# Altium PCB Växelriktare.PcbDoc (part 1 of 2)
Units mm, origin at the board's own origin, x right, y up, seen from the top; angles counter-clockwise.
Board outline 240.5 x 224.5 mm, 2 copper layers (Top Layer, Bottom Layer); 202 components, 114 nets, 617 pads, 31 vias.
Unrouted connection lines stored in the file: 137.
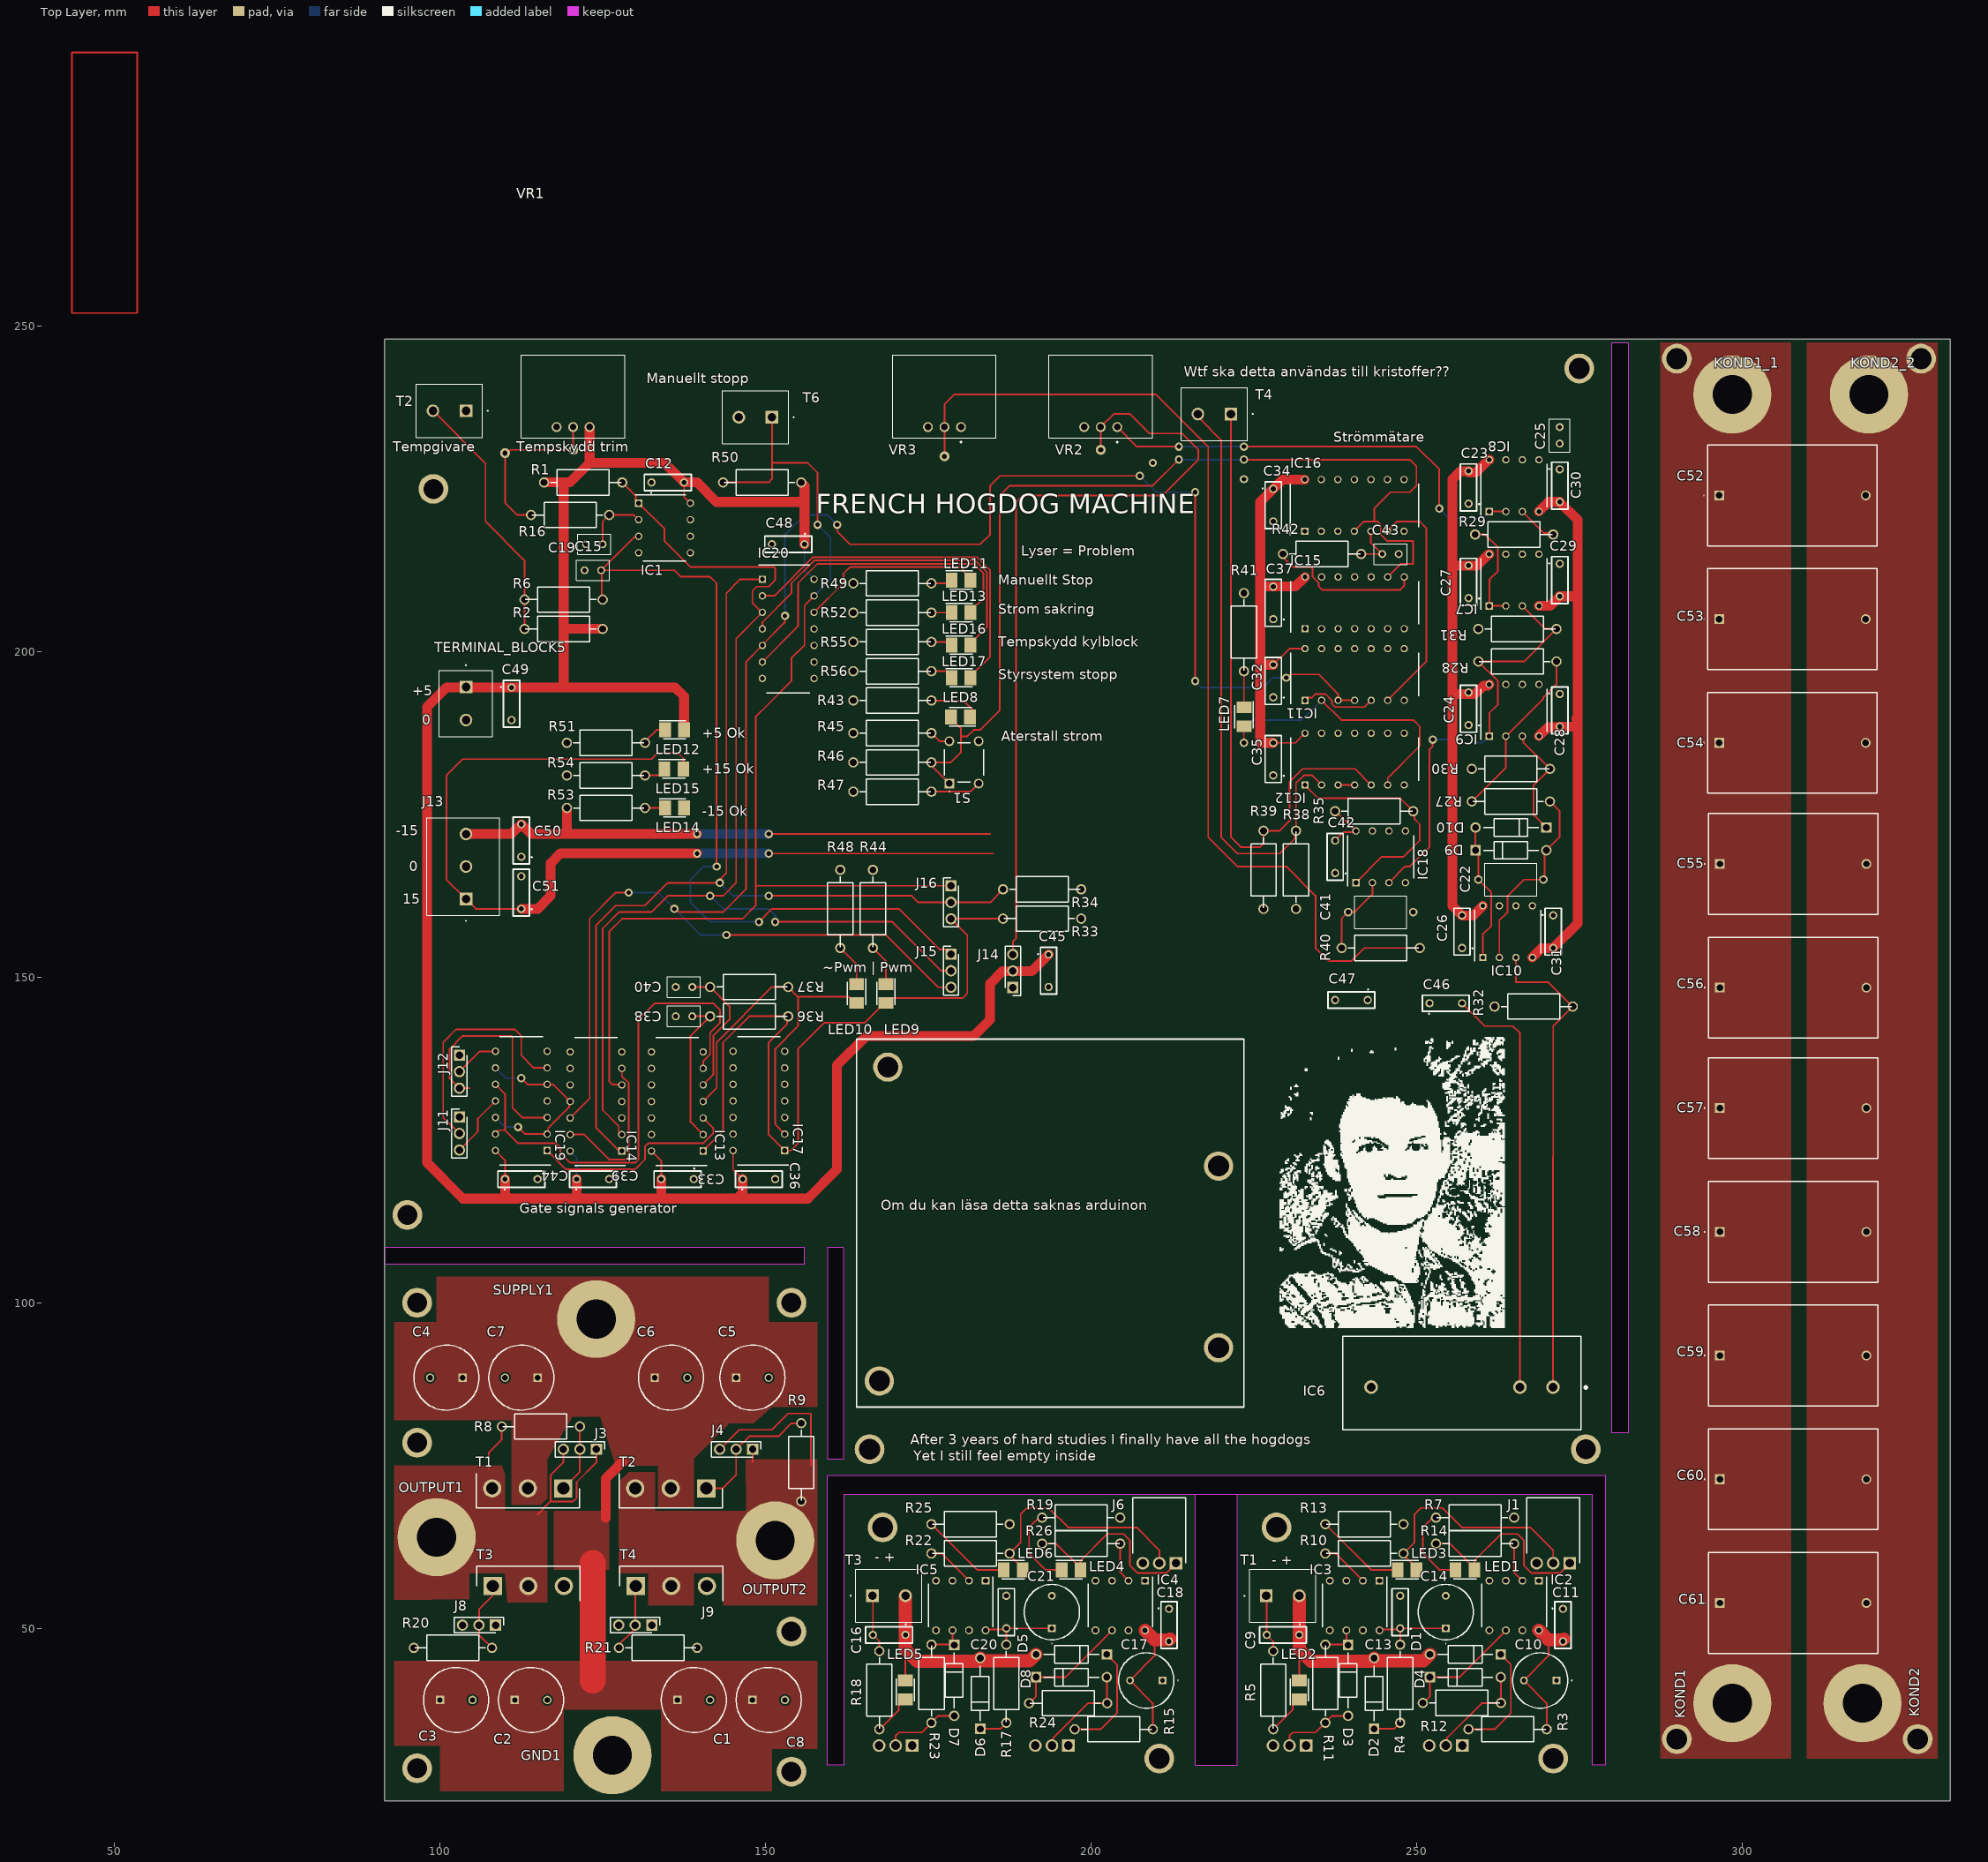
[diagram p0: Top Layer view]
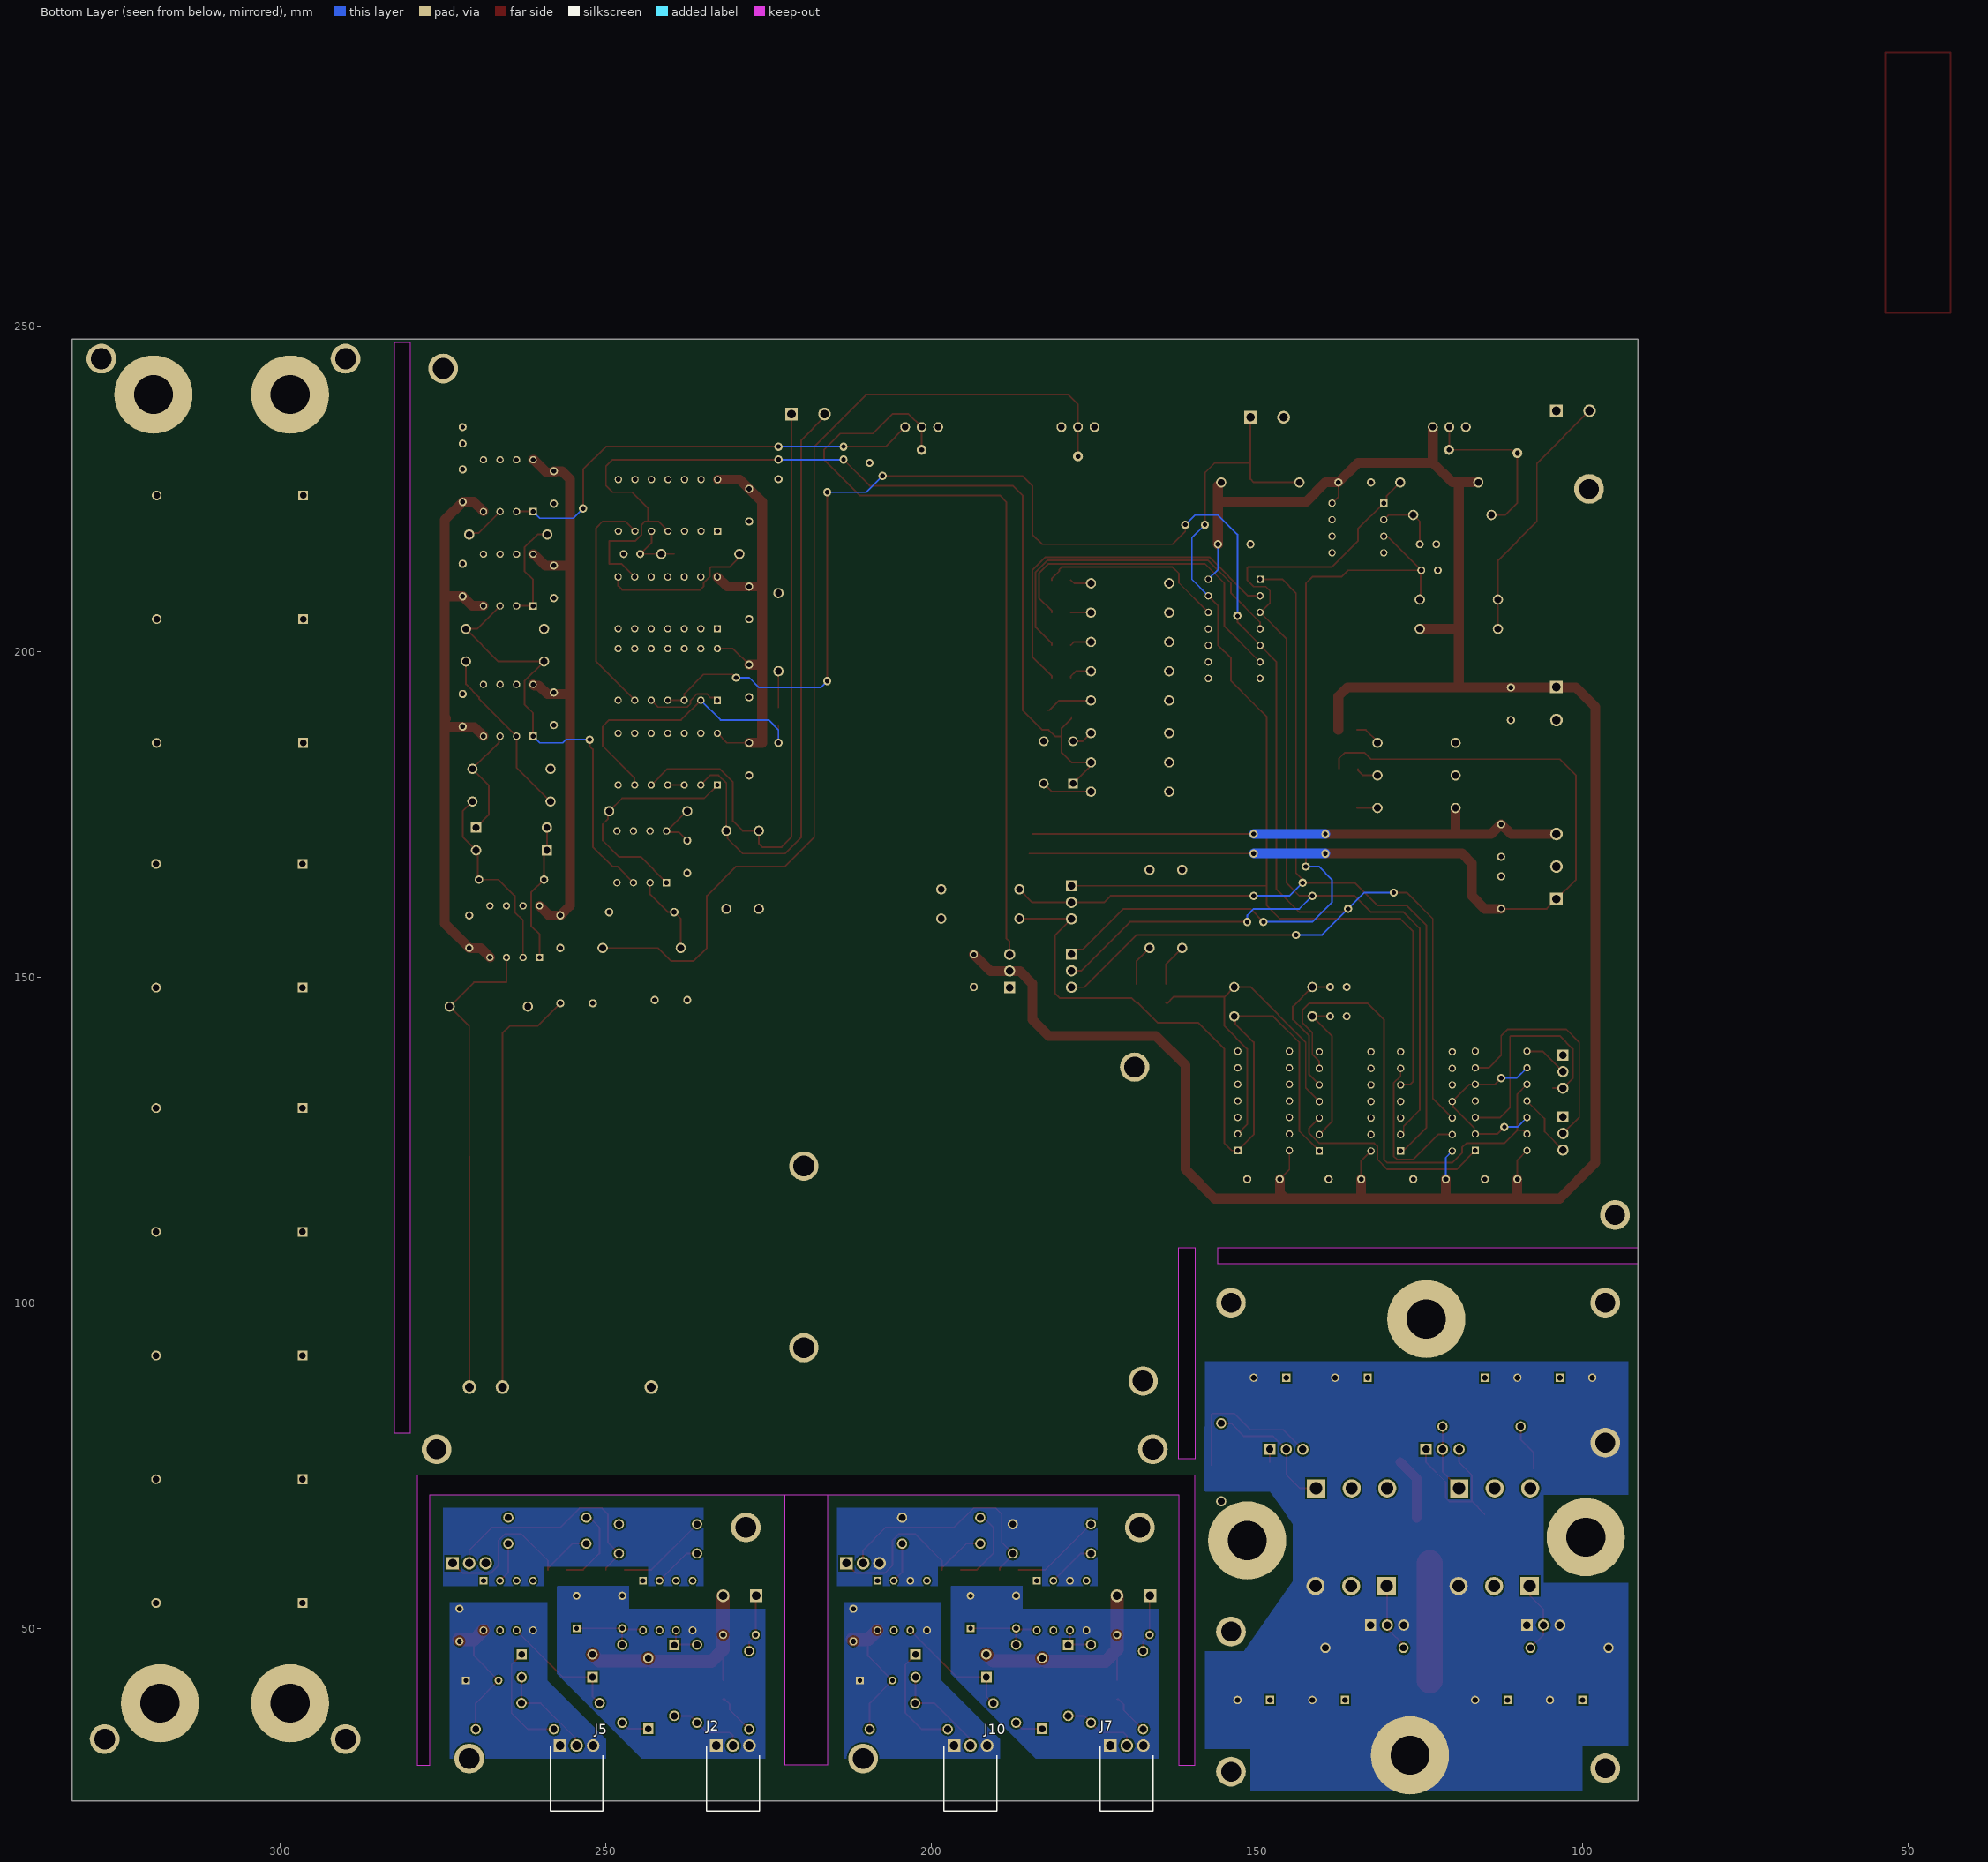
[diagram p1: Bottom Layer view, seen from below]

## Layer stack, top to bottom
Top Solder: solder mask 0.0102, Solder Resist, Dk 3.5
Top Layer: signal copper 0.0356
Dielectric 1: dielectric 0.32, FR-4, Dk 4.8
Bottom Layer: signal copper 0.0356
Bottom Solder: solder mask 0.0102, Solder Resist, Dk 3.5

## Board outline
91.5,23.5 332,23.5 332,248 91.5,248
cut-out: 159.5,76 162,76 162,108.5 159.5,108.5
cut-out: 280,247.5 282.5,247.5 282.5,80 280,80
cut-out: 91.5,106 156,106 156,108.5 91.5,108.5
cut-out: 216,70.5 216,29 222.5,29 222.5,70.5
cut-out: 159.5,73.5 279,73.5 279,29 277,29 277,70.5 162,70.5 162,29 159.5,29

## Design rules (kind name [scope] priority, off if disabled: settings)
Clearance [All] p1: gap=0.254 ignorepadtopadclearanceinfootprint=FALSE except(0: Arc-Hole Track-Hole SMDPad-Hole THPad-Hole Via-Hole Fill-Hole Poly-Hole Region-Hole Text-Hole)
PlaneConnect [InNet('GND_Galv')] p1: planeconnectstyle=Relief reliefexpansion=0.508 reliefentries=4 reliefconductorwidth=0.254 reliefairgap=0.254
PolygonConnect connect [All vs IsNamedPolygon('NONET_L-01_P-001')] p1: connectstyle=Direct reliefconductorwidth=0.254 reliefentries=4 polygonreliefangle="90 Angle" airgapwidth=0.254
PolygonConnect [All] p2: connectstyle=Relief reliefconductorwidth=0.254 reliefentries=4 polygonreliefangle="90 Angle" airgapwidth=0.254
RoutingVias [All] p1: holewidth=0.711 width=1.27 viastyle="Through Hole" minholewidth=0.711 minwidth=1.27 maxholewidth=0.711 maxwidth=1.27
SolderMaskExpansion [All] p1: expansion=0.102 istentingtop=FALSE
Width [All] p1: maxlimit=20 minlimit=0.254 preferedwidth=0.254 minimp=50.000000 maximp=50.000000 favimp=50.000000
29 further rules are at their usual default settings.

## Components (designator, comment, footprint, x,y, rotation, side; value= is the part's Value field where it differs from the comment)
C1 "63SXE100M" CAPPRD500W65D1000H1300 136.5,39 r0 top
C2 "63SXE100M" CAPPRD500W65D1000H1300 111.5,39 r0 top
C3 "63SXE100M" CAPPRD500W65D1000H1300 100,39 r0 top
C4 "63SXE100M" CAPPRD500W65D1000H1300 103.5,88.5 r180 top
C5 "63SXE100M" CAPPRD500W65D1000H1300 145.5,88.5 r0 top
C6 "63SXE100M" CAPPRD500W65D1000H1300 133,88.5 r0 top
C7 "63SXE100M" CAPPRD500W65D1000H1300 115,88.5 r180 top
C8 "63SXE100M" CAPPRD500W65D1000H1300 148,39 r0 top
C9 "0.1 uF" R82(7.2X2.5) 229.5,49 r180 top
C10 "10uF" 1814768 271.5,42 r180 top
C11 "0.1 uF" R82(7.2X2.5) 272.5,50.5 r270 top
C12 "0.1 uF" R82(7.2X2.5) 135,226 r0 top
C13 "0.1 uF" R82(7.2X2.5) 247.5,52.5 r90 top
C14 "10uF" 1814768 254.5,50 r90 top
C15 "" C320C334K5R5TA91707301 123.5,212.5 r0 top
C16 "0.1 uF" R82(7.2X2.5) 169,49 r180 top
C17 "10uF" 1814768 211,42 r180 top
C18 "0.1 uF" R82(7.2X2.5) 212,50.5 r270 top
C19 "0.1 uF" C320C334K5R5TA91707301 123.73,216.5 r0 top
C20 "0.1 uF" R82(7.2X2.5) 187,52.5 r90 top
C21 "10uF" 1814768 194,50 r90 top
C22 "47 pF" DE11XRA470KA4BQ01F 269.5,165 r180 top
C23 "0.1 uF" R82(7.2X2.5) 258,225.23 r90 top
C24 "0.1 uF" R82(7.2X2.5) 258,191.23 r90 top
C25 "C320C334K5R5TA91707301" C320C334K5R5TA91707301 272,233.23 r90 top
C26 "0.1 uF" R82(7.2X2.5) 257,157 r90 top
C27 "0.1 uF" R82(7.2X2.5) 258,210.73 r90 top
C28 "0.1 uF" R82(7.2X2.5) 272,191 r270 top
C29 "0.1 uF" R82(7.2X2.5) 272,211 r270 top
C30 "0.1 uF" R82(7.2X2.5) 272,225.5 r270 top
C31 "0.1 uF" R82(7.2X2.5) 271,157 r270 top
C32 "0.1 uF" R82(7.2X2.5) 228,195.5 r90 top
C33 "0.1 uF" R82(7.2X2.5) 136.5,119 r180 top
C34 "0.1 uF" R82(7.2X2.5) 228,222.5 r270 top
C35 "0.1 uF" R82(7.2X2.5) 228,183.5 r90 top
C36 "0.1 uF" R82(7.2X2.5) 149,119 r0 top
C37 "0.1 uF" R82(7.2X2.5) 228,207.5 r90 top
C38 "C320C334K5R5TA91707301" C320C334K5R5TA91707301 137.5,144 r180 top
C39 "0.1 uF" R82(7.2X2.5) 123.5,119 r0 top
C40 "C320C334K5R5TA91707301" C320C334K5R5TA91707301 137.5,148.5 r180 top
C41 "47 pF" DE11XRA470KA4BQ01F 249.5,160 r180 top
C42 "0.1 uF" R82(7.2X2.5) 237.5,168.5 r90 top
C43 "0.1 uF" C320C334K5R5TA91707301 246,215 r0 top
C44 "0.1 uF" R82(7.2X2.5) 112.5,119 r0 top
C45 "0.1 uF" R82(7.2X2.5) 193.5,151 r270 top
C46 "0.1 uF" R82(7.2X2.5) 254.5,146 r0 top
C47 "0.1 uF" R82(7.2X2.5) 240,146.5 r180 top
C48 "0.1 uF" R82(7.2X2.5) 153.5,216.5 r180 top
C49 "0.1 uF" R82(7.2X2.5) 111,192 r270 top
C50 "0.1 uF" R82(7.2X2.5) 112.5,171 r90 top
C51 "0.1 uF" R82(7.2X2.5) 112.5,163 r90 top
C52 "0.22u" PHE845VY6220MR30L2 296.5,224 r0 top
C53 "0.22u" PHE845VY6220MR30L2 296.5,205 r0 top
C54 "0.22u" PHE845VY6220MR30L2 296.5,186 r0 top
C55 "0.22u" PHE845VY6220MR30L2 296.6,167.401 r0 top
C56 "0.22u" PHE845VY6220MR30L2 296.6,148.401 r0 top
C57 "0.22u" PHE845VY6220MR30L2 296.6,129.901 r0 top
C58 "0.22u" PHE845VY6220MR30L2 296.6,110.901 r0 top
C59 "0.22u" PHE845VY6220MR30L2 296.6,91.901 r0 top
C60 "0.22u" PHE845VY6220MR30L2 296.6,72.901 r0 top
C61 "0.22u" PHE845VY6220MR30L2 296.6,53.901 r0 top
D1 "UF4007-E3/54" FP-UF4007-MFG 257.5,46 r180 top value=17pF
D2 "UF4007-E3/54" FP-UF4007-MFG 243.5,40 r90 top value=17pF
D3 "UF4007-E3/54" FP-UF4007-MFG 239.5,42 r270 top value=17pF
D4 "UF4007-E3/54" FP-UF4007-MFG 257.5,42.5 r0 top value=17pF
D5 "UF4007-E3/54" FP-UF4007-MFG 197,46 r180 top value=17pF
D6 "UF4007-E3/54" FP-UF4007-MFG 183,40 r90 top value=17pF
D7 "UF4007-E3/54" FP-UF4007-MFG 179,42 r270 top value=17pF
D8 "UF4007-E3/54" FP-UF4007-MFG 197,42.5 r0 top value=17pF
D9 "UF4007-E3/54" FP-UF4007-MFG 264.5,169.5 r0 top value=17pF
D10 "UF4007-E3/54" FP-UF4007-MFG 264.5,173 r180 top value=17pF
GND1 "PADS_01" PCBComponent_1 126.5,30.5 r0 top
IC1 "LM393P" DIP794W53P254L959H508Q8N 134.5,219 r0 top
IC2 "TLP350_F_" DIP762W60P254L966H485Q8N 265,53.5 r270 top
IC3 "TLP350_F_" DIP762W60P254L966H485Q8N 240.5,53.5 r270 top
IC4 "TLP350_F_" DIP762W60P254L966H485Q8N 204.5,53.5 r270 top
IC5 "TLP350_F_" DIP762W60P254L966H485Q8N 180,53.5 r270 top
IC6 "LA_100-P" LA-100-P 257,80.5 r180 top
IC7 "TL082IP" DIP794W53P254L959H508Q8N 265,211 r90 top
IC8 "TL082IP" DIP794W53P254L959H508Q8N 265,225.5 r90 top
IC9 "TL082IP" DIP794W53P254L959H508Q8N 265,191 r90 top
IC10 "TL082IP" DIP794W53P254L959H508Q8N 264,157 r90 top
IC11 "SN74HC02N" DIP794W53P254L1930H508Q14N 240.5,196.5 r90 top
IC12 "SN74HC32N" DIP794W53P254L1930H508Q14N 240.5,183.5 r90 top
IC13 "SN74HC08N" DIP794W53P254L1930H508Q14N 136.47,130.92 r180 top
IC14 "SN74HC08N" DIP794W53P254L1930H508Q14N 123.97,130.92 r180 top
IC15 "SN74HCT04N" DIP794W53P254L1930H508Q14N 240.5,207.5 r90 top
IC16 "SN74HC08N" DIP794W53P254L1930H508Q14N 240.46,222.47 r90 top
IC17 "SN74HCT04N" DIP794W53P254L1930H508Q14N 149,131 r180 top
IC18 "LM393P" DIP794W53P254L959H508Q8N 244.5,168.5 r90 top
IC19 "SN74HC08N" DIP794W53P254L1930H508Q14N 112.5,131 r180 top
IC20 "SN74HCT04N" DIP794W53P254L1930H508Q14N 153.5,203.5 r0 top
J1 "angled" RHDRRA3W79P254_1X3_813X851X241P 273.54,60 r0 top
J2 "angled" RHDRRA3W79P254_1X3_813X851X241P 233.04,32 r0 bottom
J3 "straight" HDRV3W67P0X254_1X3_737X236X1117P 124.04,77.5 r180 top
J4 "straight" HDRV3W67P0X254_1X3_737X236X1117P 148.04,77.5 r180 top
J5 "angled" RHDRRA3W79P254_1X3_813X851X241P 257.04,32 r0 bottom
J6 "angled" RHDRRA3W79P254_1X3_813X851X241P 213.04,60 r0 top
J7 "angled" RHDRRA3W79P254_1X3_813X851X241P 172.54,32 r0 bottom
J8 "straight" HDRV3W67P0X254_1X3_737X236X1117P 108.54,50.5 r180 top
J9 "straight" HDRV3W67P0X254_1X3_737X236X1117P 132.54,50.5 r180 top
J10 "angled" RHDRRA3W79P254_1X3_813X851X241P 196.54,32 r0 bottom
J11 "straight" HDRV3W67P0X254_1X3_737X236X1117P 103,128.54 r270 top
J12 "straight" HDRV3W67P0X254_1X3_737X236X1117P 103,138.04 r270 top
J13 "PLUS" 1711039 104,162 r90 top
J14 "straight" HDRV3W67P0X254_1X3_737X236X1117P 188,148.42 r90 top
J15 "straight" HDRV3W67P0X254_1X3_737X236X1117P 178.5,153.54 r270 top
J16 "straight" HDRV3W67P0X254_1X3_737X236X1117P 178.5,164.04 r270 top
KOND1 "PADS_01" PCBComponent_1 298.5,38.5 r0 top
KOND1_1 "PADS_01" PCBComponent_1 298.5,239.5 r90 top
KOND2 "PADS_01" PCBComponent_1 318.5,38.5 r0 top
KOND2_2 "PADS_01" PCBComponent_1 319.5,239.5 r90 top
LED1 "150141RS73113" LEDM3528X210N 257.45,59 r0 top
LED2 "150141RS73113" LEDM3528X210N 232,40.55 r90 top
LED3 "150141RS73113" LEDM3528X210N 248.55,59 r0 top
LED4 "150141RS73113" LEDM3528X210N 196.95,59 r0 top
LED5 "150141RS73113" LEDM3528X210N 171.5,40.55 r90 top
LED6 "150141RS73113" LEDM3528X210N 188.05,59 r0 top
LED7 "150141RS73113" LEDM3528X210N 223.5,190 r270 top
LED8 "150141RS73113" LEDM3528X210N 179.95,190 r180 top
LED9 "150141RS73113" LEDM3528X210N 168.5,147.5 r270 top
LED10 "150141RS73113" LEDM3528X210N 164,147.5 r270 top
LED11 "150141RS73113" LEDM3528X210N 180.05,211 r0 top
LED12 "150141RS73113" LEDM3528X210N 136.05,188 r0 top
LED13 "150141RS73113" LEDM3528X210N 180.05,206 r0 top
LED14 "150141RS73113" LEDM3528X210N 136.05,176 r0 top
LED15 "150141RS73113" LEDM3528X210N 135.95,182 r0 top
LED16 "150141RS73113" LEDM3528X210N 180.05,201 r0 top
LED17 "150141RS73113" LEDM3528X210N 180.05,196 r0 top
OUTPUT1 "PADS_01" PCBComponent_1 99.5,64 r0 top
OUTPUT2 "PADS_01" PCBComponent_1 151.5,63.5 r0 top
R1 "" RESAD2760W83L1200D390 128,226 r180 top
R2 "330 ohm" RESAD2760W83L1200D390 113,203.5 r0 top
R3 "10 ohm" RESAD2760W83L1200D390 270,34.5 r180 top
R4 "10 ohm" RESAD2760W83L1200D390 247.5,35.5 r90 top
R5 "2k" RESAD2760W83L1200D390 228,34.5 r90 top
R6 "" RESAD2760W83L1200D390 113,208 r0 top
R7 "1k" RESAD2760W83L1200D390 253,67 r0 top
R8 "10k ohm" RESAD2760W83L1200D390 109.5,81 r0 top
R9 "10k ohm" RESAD2760W83L1200D390 155.5,69.5 r90 top
R10 "330 ohm" RESAD2760W83L1200D390 236,61.5 r0 top
R11 "10 ohm" RESAD2760W83L1200D390 236,47.5 r270 top
R12 "10 ohm" RESAD2760W83L1200D390 262.969,38.531 r180 top
R13 "1k" RESAD2760W83L1200D390 236,66 r0 top
R14 "330 ohm" RESAD2760W83L1200D390 265,63 r180 top
R15 "10 ohm" RESAD2760W83L1200D390 209.5,34.5 r180 top
R16 "" RESAD2760W83L1200D390 114,221 r0 top
R17 "10 ohm" RESAD2760W83L1200D390 187,35.5 r90 top
R18 "2k" RESAD2760W83L1200D390 167.5,34.5 r90 top
R19 "1k" RESAD2760W83L1200D390 192.5,67 r0 top
R20 "10k ohm" RESAD2760W83L1200D390 96,47 r0 top
R21 "10k ohm" RESAD2760W83L1200D390 139.5,47 r180 top
R22 "330 ohm" RESAD2760W83L1200D390 175.5,61.5 r0 top
R23 "10 ohm" RESAD2760W83L1200D390 175.5,47.5 r270 top
R24 "10 ohm" RESAD2760W83L1200D390 190.5,38.5 r0 top
R25 "1k" RESAD2760W83L1200D390 175.5,66 r0 top
R26 "330 ohm" RESAD2760W83L1200D390 204.5,63 r180 top
R27 "PR02000201009JR500" RESAD2760W83L1200D390 258.5,177 r0 top
R28 "PR02000201009JR500" RESAD2760W83L1200D390 259.5,198.5 r0 top
R29 "PR02000201009JR500" RESAD2760W83L1200D390 271,218 r180 top
R30 "PR02000201009JR500" RESAD2760W83L1200D390 270.5,182 r180 top
R31 "PR02000201009JR500" RESAD2760W83L1200D390 271.5,203.5 r180 top
R32 "PR02000201009JR500" RESAD2760W83L1200D390 274,145.5 r180 top
R33 "1k" RESAD2760W83L1200D390 186.5,159 r0 top
R34 "1k" RESAD2760W83L1200D390 198.5,163.5 r180 top
R35 "5.1k" RESAD2760W83L1200D390 249.5,175.5 r180 top
R36 "PR02000201009JR500" RESAD2760W83L1200D390 153.5,144 r180 top
R37 "PR02000201009JR500" RESAD2760W83L1200D390 153.5,148.5 r180 top
R38 "PR02000201009JR500" RESAD2760W83L1200D390 231.5,172.5 r270 top
R39 "PR02000201009JR500" RESAD2760W83L1200D390 226.5,160.5 r90 top
R40 "5.1k" RESAD2760W83L1200D390 250.5,154.5 r180 top
R41 "1k" RESAD2760W83L1200D390 223.5,197 r90 top
R42 "PR02000201009JR500" RESAD2760W83L1200D390 241.5,215 r180 top
R43 "1k" RESAD2760W83L1200D390 175.5,192.5 r180 top
R44 "1k" RESAD2760W83L1200D390 166.5,154.5 r90 top
R45 "PR02000201009JR500" RESAD2760W83L1200D390 175.5,187.5 r180 top
R46 "PR02000201009JR500" RESAD2760W83L1200D390 175.5,183 r180 top
R47 "PR02000201009JR500" RESAD2760W83L1200D390 175.5,178.5 r180 top
R48 "1k" RESAD2760W83L1200D390 161.5,154.5 r90 top
R49 "1k" RESAD2760W83L1200D390 175.5,210.5 r180 top
R50 "PR02000201009JR500" RESAD2760W83L1200D390 143.5,226 r0 top
R51 "1k" RESAD2760W83L1200D390 131.5,186 r180 top
R52 "1k" RESAD2760W83L1200D390 175.5,206 r180 top
R53 "1k" RESAD2760W83L1200D390 131.5,176 r180 top
R54 "1k" RESAD2760W83L1200D390 131.5,181 r180 top
R55 "1k" RESAD2760W83L1200D390 175.5,201.5 r180 top
R56 "1k" RESAD2760W83L1200D390 175.5,197 r180 top
S1 "PTS645SM43-2_LFS" PTS645SM432LFS 180.5,183 r90 top
SUPPLY1 "PADS_01" PCBComponent_1 124,97.5 r90 top
T1 "1729128" 1729128 226.92,55 r0 top
T1 "IRFP4468PBF" TO546P531X1558X2499-3P 118.96,71.5 r180 top
T2 "1729128" 1729128 104,237 r180 top
T2 "IRFP4468PBF" TO546P531X1558X2499-3P 140.92,71.5 r180 top locked
T3 "1729128" 1729128 166.42,55 r0 top
T3 "IRFP4468PBF" TO546P531X1558X2499-3P 108.12,56.5 r0 top
T4 "1729128" 1729128 221.5,236.5 r180 top
T4 "IRFP4468PBF" TO546P531X1558X2499-3P 130.08,56.5 r0 top
T6 "1729128" 1729128 151,236 r180 top
TERMINAL_BLOCK5 "1729128" 1729128 104,194.58 r270 top
VR1 "91A1A-B28-A10L" 91A1AB28A10L 123,234.5 r90 top
VR2 "91A1A-B28-A10L" 91A1AB28A10L 204.04,234.5 r90 top
VR3 "91A1A-B28-A10L" 91A1AB28A10L 180.04,234.5 r90 top

## Footprints (in the part's own frame and the unit in brackets; to place one, negate y for a bottom-side part, rotate by r counter-clockwise, add the part's x,y. Pads: shape width x height; smd on the part's side, far side on the other; paste and mask are expansions set on the pad)
91A1AB28A10L [mm]
  round 1.515 hole 1.01: 1(0,0) 2(0,2.54) 3(0,5.08)
  silkscreen extent -2.4,-5.4 11.05,10.48, body extent -1.9,-5.4 33.03,10.48, height 18.1
1711039 [mm]
  rect 1.95x1.95 hole 1.3: 1(0,0)
  round 1.95 hole 1.3: 2(5,0) 3(10,0)
  silkscreen extent -3.4,-5.2 12.5,6, body extent -2.43,-5.73 13.14,5.47, height 18.53
1729128 [mm]
  rect 1.95x1.95 hole 1.3: 1(0,0)
  round 1.95 hole 1.3: 2(5.08,0)
  silkscreen extent -3.4,-4.08 7.62,4.08, body extent -2.82,-4.05 7.74,4.05, height 10.32
1814768 [mm]
  rect 1.2x1.2 hole 0.7: 1(0,0)
  round 1.2 hole 0.7: 2(5,0)
  silkscreen extent -2.4,-4.25 6.75,4.25, body extent -1.75,-4.24 6.75,4.24, height 13.1
C320C334K5R5TA91707301 [mm]
  round 1.217 hole 0.71: 1(-1.27,0) 2(1.27,0)
  silkscreen extent -2.54,-1.59 2.54,1.59, body extent -2.54,-1.6 2.54,1.59, height 5.51
CAPPRD500W65D1000H1300 [mm]
  rect 1.275x1.275 hole 0.85: 1(0,0)
  round 1.275 hole 0.85: 2(5,0)
  silkscreen extent -2.5,-5 7.5,5, body extent -2.75,-5.24 7.75,5.24, height 13
DE11XRA470KA4BQ01F [mm]
  round 1.3 hole 0.8: 1(0,0) 2(10,0)
  silkscreen extent 1,-2.5 9,2.5, body extent -0.3,-2.5 10.3,2.5, height 11.1
DIP762W60P254L966H485Q8N [mm]
  rect 1.2x1.2 hole 0.8: 1(-3.81,3.81)
  round 1.2 hole 0.8: 2(-3.81,1.27) 3(-3.81,-1.27) 4(-3.81,-3.81) 5(3.81,-3.81) 6(3.81,-1.27) 7(3.81,1.27) 8(3.81,3.81)
  silkscreen extent -4.41,-4.95 3.32,4.95, body extent -3.96,-4.83 3.96,4.83, height 4.85
DIP794W53P254L959H508Q8N [mm]
  rect 1.13x1.13 hole 0.73: 1(-3.97,3.81)
  round 1.13 hole 0.73: 2(-3.97,1.27) 3(-3.97,-1.27) 4(-3.97,-3.81) 5(3.97,-3.81) 6(3.97,-1.27) 7(3.97,1.27) 8(3.97,3.81)
  silkscreen extent -4.53,-5.08 3.3,5.08, body extent -4.1,-4.64 4.1,4.64, height 4.21
DIP794W53P254L1930H508Q14N [mm]
  rect 1.13x1.13 hole 0.73: 1(-3.97,7.62)
  round 1.13 hole 0.73: 2(-3.97,5.08) 3(-3.97,2.54) 4(-3.97,0) 5(-3.97,-2.54) 6(-3.97,-5.08) 7(-3.97,-7.62) 8(3.97,-7.62) 9(3.97,-5.08) 10(3.97,-2.54) 11(3.97,0) 12(3.97,2.54) 13(3.97,5.08) 14(3.97,7.62)
  silkscreen extent -4.53,-9.84 3.3,9.84, body extent -3.94,-9.84 3.94,9.84, height 5.27
FP-UF4007-MFG [mm]
  rect 1.6x1.6 hole 1.05 paste-1000 mask+0: 1(-5.438,0)
  round 1.6 hole 1.05 paste-1000 mask+0: 2(5.438,0)
  silkscreen extent -4.24,-1.35 4.24,1.35, body extent -6.34,-1.45 6.34,1.45, height 0.25
HDRV3W67P0X254_1X3_737X236X1117P [mm]
  rect 1.725x1.725 hole 1.15: 1(0,0)
  round 1.725 hole 1.15: 2(2.54,0) 3(5.08,0)
  silkscreen extent -1.24,-1.18 6.32,1.18, body extent -1.14,-1.2 6.22,1.16, height 10.84
LA-100-P [mm]
  round 2.1 hole 1.35: 1(-13.97,-6.55) 2(-8.89,-6.55) 3(13.97,-6.55)
  silkscreen extent -19.17,-14.35 18.3,0
LEDM3528X210N [mm]
  rect 1.8x2.3 smd: 1(-1.45,0) 2(1.45,0)
  silkscreen extent -2.35,-1.4 1.75,1.4
PCBComponent_1 [mm]
  round 12 hole 6: 1(0,0)
PHE845VY6220MR30L2 [mm]
  rect 1.5x1.5 hole 1: 1(0,0)
  round 1.5 hole 1: 2(22.5,0)
  silkscreen extent -2.4,-7.75 24.25,7.75, body extent -2,-8 24,7.5, height 25
PTS645SM432LFS [mm]
  rect 1.5x1.5 hole 1: 1(-3.25,2.25)
  round 1.5 hole 1: 2(3.25,2.25) 3(-3.25,-2.25) 4(3.25,-2.25)
  silkscreen extent -4.5,-3 3,3, body extent -3.65,-3 3.65,3, height 4.5
R82(7.2X2.5) [mm]
  round 1.26 hole 0.76: 1(-2.5,0) 2(2.5,0)
  silkscreen extent -3.6,-1.64 3.6,1.25, body extent -3.7,-1.43 3.7,1.18, height 6.6
RESAD2760W83L1200D390 [mm]
  round 1.575 hole 1.05: 1(0,0) 2(12,0)
  silkscreen extent 0.14,-1.95 11,1.95, body extent 3,-1 9,1, height 0.25
RHDRRA3W79P254_1X3_813X851X241P [mm]
  rect 1.95x1.95 hole 1.3: 1(0,0)
  round 1.95 hole 1.3: 2(-2.54,0) 3(-5.08,0)
  silkscreen extent -6.61,0 1.53,10.03, body extent -6.61,-0.4 1.53,10.03, height 2.41
TO546P531X1558X2499-3P [mm]
  rect 2.79x2.79 hole 1.86: 1(0,0)
  round 2.79 hole 1.86: 2(5.46,0) 3(10.92,0)
  silkscreen extent -2.47,-2.27 13.39,3.04, body extent -2.33,-2.27 13.25,3.04, height 24.2

## Part data
C1 C2 C3 C4 C5 C6 C7 C8: "Capacitor Polarised", Manufacturer_Name=Panasonic, Mouser Part Number=667-63SXE100M, Datasheet Link=http://industrial.panasonic.com/cdbs/www-data/pdf/AAB8000/AAB8000C262.pdf, Height=13mm, Manufacturer_Part_Number=63SXE100M, Mouser Price/Stock=https://www.mouser.co.uk/ProductDetail/Panasonic/63SXE100M?qs=%252B6g0mu59x7Ltzd4977WBfg%3D%3D
C9 C11 C12 C13 C15 C16 C18 C19 C20 C23 C24 C26 C27 C28 C29 C30 C31 C32 C33 C34 C35 C36 C37 C39 C42 C43 C44 C45 C46 C47 C48 C49 C50 C51: library part C320C334K5R5TA91707301, "Capacitor", Manufacturer_Name=KEMET, Mouser Part Number=80-C320C334K5R9170-R, Datasheet Link=https://content.kemet.com/datasheets/KEM_C1053_GOLDMAX_X7R_AUTO.pdf, Manufacturer_Part_Number=C320C334K5R5TA91707301, Mouser Price/Stock=https://www.mouser.co.uk/ProductDetail/KEMET/C320C334K5R5TA91707301?qs=CMe0l2alOJWOav3f3bfBiQ%3D%3D
C10 C14 C17 C21: library part 181-4768, "Capacitor", Manufacturer_Name="RS Components", Datasheet Link=https://docs.rs-online.com/821c/0900766b816c111a.pdf, Height=13mm, Manufacturer_Part_Number=181-4768
C22 C41: library part DE11XRA470KA4BQ01F, "Capacitor", Manufacturer_Name="Murata Electronics", Mouser Part Number=81-DE11XRA470KA4BQ1F, Arrow Part Number=DE11XRA470KA4BQ01F, Arrow Price/Stock=https://www.arrow.com/en/products/de11xra470ka4bq01f/murata-manufacturing, Datasheet Link=https://www.mouser.com/datasheet/2/281/DE1_RA_Q01F_E-1115434.pdf, Height=11mm, Manufacturer_Part_Number=DE11XRA470KA4BQ01F, Mouser Price/Stock=https://www.mouser.co.uk/ProductDetail/Murata-Electronics/DE11XRA470KA4BQ01F?qs=5aG0NVq1C4zq%2FuZurxxCqg%3D%3D
C25 C38 C40: "Capacitor", Manufacturer_Name=KEMET, Mouser Part Number=80-C320C334K5R9170-R, Datasheet Link=https://content.kemet.com/datasheets/KEM_C1053_GOLDMAX_X7R_AUTO.pdf, Manufacturer_Part_Number=C320C334K5R5TA91707301, Mouser Price/Stock=https://www.mouser.co.uk/ProductDetail/KEMET/C320C334K5R5TA91707301?qs=CMe0l2alOJWOav3f3bfBiQ%3D%3D
C52 C53 C54 C55 C56 C57 C58 C59 C60 C61: library part PHE845VY6220MR30L2, "Capacitor", Manufacturer_Name=KEMET, Mouser Part Number=80-PHE845VY6220MR30, Datasheet Link=https://connect.kemet.com:7667/gateway/IntelliData-ComponentDocumentation/1.0/download/specsheet/F845DY224M760ALW0L, Height=24.5mm, Manufacturer_Part_Number=PHE845VY6220MR30L2, Mouser Price/Stock=https://www.mouser.co.uk/ProductDetail/KEMET/PHE845VY6220MR30L2?qs=MdJgNetHbfmnkWE77glUFA%3D%3D
D1 D2 D3 D4 D5 D6 D7 D8 D9 D10: library part CMP-02540-000043-1, "DIODE GEN PURP 1KV 1A DO204AL", Capacitance=17pF, Forward Current=1A, Manufacturer=Vishay, Max Junction Temp=+150°C, Max Repetitive Reverse Voltage=1000V, Max Surge Forward Current=30A, Package=UF4007, Peak Reverse Current=10uA, Temperature="-55°C to +150°C", Temperature Range Low=-55°C, Automotive=No, Category=Diode, ComponentLink2Description=Datasheet, ComponentLink2URL=http://www.vishay.com/docs/88755/uf4001.pdf, Device Class L1="Discrete Semiconductors", Device Class L2=Diodes, Device Class L3="Rectifier Diodes", Digikey Description="DIODE GEN PURP 1KV 1A DO204AL", Height=2.7mm, Ipc Land Pattern Name=DIOPA1088W105L520D270, Lead Free=Yes, Manufacturer Part Number=UF4007-E3/54, Mouser Description="Rectifiers Vr/1000V Io/1A", Octopart=https://octopart.com/uf4007-e3%2F54-vishay-42333894, RoHS=TRUE, Temperature Range High=+150°C
GND1 KOND1 KOND1_1 KOND2 KOND2_2 OUTPUT1 OUTPUT2 SUPPLY1: "Pads for bigger Coil and capacitors outside your circuit"
IC1 IC18: "Integrated Circuit", Manufacturer_Name="Texas Instruments", Mouser Part Number=595-LM393P, Arrow Part Number=LM393P, Arrow Price/Stock=https://www.arrow.com/en/products/lm393p/texas-instruments?region=nac, Datasheet Link=http://www.ti.com/lit/ds/symlink/lm393.pdf, Height=5.08mm, Manufacturer_Part_Number=LM393P, Mouser Price/Stock=https://www.mouser.co.uk/ProductDetail/Texas-Instruments/LM393P?qs=1K8%2FAQHn5WT5g4otW1rg%2Fg%3D%3D
IC2 IC3 IC4 IC5: "Integrated Circuit", Manufacturer_Name=Toshiba, Manufacturer_Part_Number=TLP350(F), Mouser Part Number=757-TLP350(F), Datasheet Link=https://toshiba.semicon-storage.com/info/docget.jsp?did=6217&prodName=TLP350, Height=4.85mm, Mouser Price/Stock=https://www.mouser.co.uk/ProductDetail/Toshiba/TLP350F?qs=f0GatGUIxV2gwSZ6twItgg%3D%3D
IC6: "Undefined or Miscellaneous", Manufacturer_Name=LEM, Manufacturer_Part_Number="LA 100-P", Datasheet Link=https://datasheet.datasheetarchive.com/originals/distributors/Datasheets-16/DSA-314838.pdf
IC7 IC8 IC9 IC10: "Integrated Circuit", Manufacturer_Name="Texas Instruments", Mouser Part Number=595-TL082IP, Arrow Part Number=TL082IP, Arrow Price/Stock=https://www.arrow.com/en/products/tl082ip/texas-instruments, Datasheet Link=http://www.ti.com/lit/ds/symlink/tl081a.pdf, Height=5.08mm, Manufacturer_Part_Number=TL082IP, Mouser Price/Stock=https://www.mouser.com/Search/Refine.aspx?Keyword=595-TL082IP
IC11: "Integrated Circuit", Manufacturer_Name="Texas Instruments", Mouser Part Number=595-SN74HC02N, Arrow Part Number=SN74HC02N, Arrow Price/Stock=https://www.arrow.com/en/products/sn74hc02n/texas-instruments?region=nac, Datasheet Link=https://datasheet.datasheetarchive.com/originals/distributors/SFDatasheet-6/sf-000133830.pdf, Height=5.08mm, Manufacturer_Part_Number=SN74HC02N, Mouser Price/Stock=https://www.mouser.co.uk/ProductDetail/Texas-Instruments/SN74HC02N?qs=st7IWvlL5%2FjbIdufZ10xyA%3D%3D
IC12: "Integrated Circuit", Manufacturer_Name="Texas Instruments", Mouser Part Number=595-SN74HC32N, Arrow Part Number=SN74HC32N, Arrow Price/Stock=https://www.arrow.com/en/products/sn74hc32n/texas-instruments, Datasheet Link=http://www.ti.com/lit/gpn/sn74hc32, Height=5.08mm, Manufacturer_Part_Number=SN74HC32N, Mouser Price/Stock=https://www.mouser.co.uk/ProductDetail/Texas-Instruments/SN74HC32N?qs=tJ5HNKWh3OWs99bm2e8RtQ%3D%3D
IC13 IC14 IC16 IC19: "Integrated Circuit", Manufacturer_Name="Texas Instruments", Mouser Part Number=595-SN74HC08N, Arrow Part Number=SN74HC08N, Arrow Price/Stock=https://www.arrow.com/en/products/sn74hc08n/texas-instruments?region=nac, Datasheet Link=http://componentsearchengine.com/Datasheets/1/SN74HC08N.pdf, Height=5.08mm, Manufacturer_Part_Number=SN74HC08N, Mouser Price/Stock=https://www.mouser.co.uk/ProductDetail/Texas-Instruments/SN74HC08N?qs=UGVLDq%2F29uh3etwCLMoeTA%3D%3D
IC15 IC17 IC20: "Integrated Circuit", Manufacturer_Name="Texas Instruments", Mouser Part Number=595-SN74HCT04N, Arrow Part Number=SN74HCT04N, Arrow Price/Stock=https://www.arrow.com/en/products/sn74hct04n/texas-instruments?region=nac, Datasheet Link=http://www.ti.com/lit/gpn/sn74hct04, Height=5.08mm, Manufacturer_Part_Number=SN74HCT04N, Mouser Price/Stock=https://www.mouser.co.uk/ProductDetail/Texas-Instruments/SN74HCT04N?qs=dQtLEVC3WoYXjRsBQqZvgw%3D%3D
J1 J2 J5 J6 J7 J10: library part SSW-103-02-G-S-RA-LL, "Connector", Manufacturer_Name=SAMTEC, Mouser Part Number=200-SSW10302GSRALL, Datasheet Link=http://suddendocs.samtec.com/catalog_english/ssw_th.pdf, Height=2.41mm, Manufacturer_Part_Number=SSW-103-02-G-S-RA-LL, Mouser Price/Stock=https://www.mouser.co.uk/ProductDetail/Samtec/SSW-103-02-G-S-RA-LL?qs=lDMevKbHVyti%252BcbLX5U9iA%3D%3D
J3 J4 J8 J9 J11 J12 J14 J15 J16: library part 22-03-2031, "Connector", Manufacturer_Name=Molex, Mouser Part Number=538-22-03-2031, Datasheet Link=http://www.molex.com/pdm_docs/sd/022032031_sd.pdf, Height=11.17mm, Manufacturer_Part_Number=22-03-2031, Mouser Price/Stock=https://www.mouser.co.uk/ProductDetail/Molex/22-03-2031?qs=ILqg114nvd5V8pMNdVJtPA%3D%3D
J13: library part 1711039, "Connector", Manufacturer_Name="Phoenix Contact", Mouser Part Number=651-1711039, Arrow Part Number=1711039, Arrow Price/Stock=https://www.arrow.com/en/products/1711039/phoenix-contact?region=nac, Datasheet Link=http://www.phoenixcontact.com/de/produkte/1711039/pdf, Height=18.2mm, Manufacturer_Part_Number=1711039, Mouser Price/Stock=https://www.mouser.co.uk/ProductDetail/Phoenix-Contact/1711039?qs=YbgdthCBnKeEUIePCOJ5Kg%3D%3D
LED1 LED2 LED3 LED4 LED5 LED6 LED7 LED8 LED9 LED10 LED11 LED12 LED13 LED14 LED15 LED16 LED17: "LED", Manufacturer_Name="Wurth Elektronik", Mouser Part Number=710-150141RS73113, Datasheet Link=https://katalog.we-online.de/led/datasheet/150141RS73113.pdf, Height=2.1mm, Manufacturer_Part_Number=150141RS73113, Mouser Price/Stock=https://www.mouser.co.uk/ProductDetail/Wurth-Elektronik/150141RS73113?qs=u16ybLDytRaJkUgH%252BpeDTw%3D%3D
R1 R2 R3 R4 R5 R6 R7 R8 R9 R10 R11 R12 R13 R14 R15 R16 R17 R18 R19 R20 R21 R22 R23 R24 R25 R26 R33 R34 R35 R40 R41 R43 R44 R48 R49 R51 R52 R53 R54 R55 R56: library part PR02000201009JR500, "Resistor", Manufacturer_Name=Vishay, Mouser Part Number=594-5083NW10R00J, Arrow Part Number=PR02000201009JR500, Arrow Price/Stock=https://www.arrow.com/en/products/pr02000201009jr500/vishay?region=nac, Datasheet Link=https://componentsearchengine.com/Datasheets/2/PR02000201009JR500.pdf, Manufacturer_Part_Number=PR02000201009JR500, Mouser Price/Stock=https://www.mouser.co.uk/ProductDetail/Vishay-BC-Components/PR02000201009JR500?qs=7reVrgTiN3YqjE9KUsFQcQ%3D%3D
R27 R28 R29 R30 R31 R32 R36 R37 R38 R39 R42 R45 R46 R47 R50: "Resistor", Manufacturer_Name=Vishay, Mouser Part Number=594-5083NW10R00J, Arrow Part Number=PR02000201009JR500, Arrow Price/Stock=https://www.arrow.com/en/products/pr02000201009jr500/vishay?region=nac, Datasheet Link=https://componentsearchengine.com/Datasheets/2/PR02000201009JR500.pdf, Manufacturer_Part_Number=PR02000201009JR500, Mouser Price/Stock=https://www.mouser.co.uk/ProductDetail/Vishay-BC-Components/PR02000201009JR500?qs=7reVrgTiN3YqjE9KUsFQcQ%3D%3D
S1: "Switch", Arrow Part Number="PTS645SM43-2 LFS", Manufacturer_Name="C & K COMPONENTS", Mouser Part Number=611-PTS645SM432, Arrow Price/Stock=https://www.arrow.com/en/products/pts645sm432lfs/ck?region=nac, Datasheet Link=https://www.tme.com/Document/8b519d7a65df20ea1a483c3db2ec3948/pts645-DTE.pdf, Height=4.4mm, Manufacturer_Part_Number="PTS645SM43-2 LFS", Mouser Price/Stock=https://www.mouser.com/Search/Refine.aspx?Keyword=611-PTS645SM432
T1 T2 T3 T4 T6 TERMINAL_BLOCK5: "Connector", Manufacturer_Name="Phoenix Contact", Mouser Part Number=651-1729128, Arrow Part Number=1729128, Arrow Price/Stock=https://www.arrow.com/en/products/1729128/phoenix-contact?region=nac, Datasheet Link=http://www.phoenixcontact.net/product/1729128, Height=10.15mm, Manufacturer_Part_Number=1729128, Mouser Price/Stock=https://www.mouser.co.uk/ProductDetail/Phoenix-Contact/1729128?qs=GFUSqQMLmmnCBVBY3dts9w%3D%3D
T1 T2 T3 T4: "MOSFET (N-Channel)", Manufacturer_Name=Infineon, Mouser Part Number=942-IRFP4468PBF, Arrow Part Number=IRFP4468PBF, Arrow Price/Stock=https://www.arrow.com/en/products/irfp4468pbf/infineon-technologies-ag?region=nac, Datasheet Link=https://eagle.componentsearchengine.com/Datasheets/2/IRFP4468PBF.pdf, Height=5.31mm, Manufacturer_Part_Number=IRFP4468PBF, Mouser Price/Stock=https://www.mouser.co.uk/ProductDetail/Infineon-Technologies/IRFP4468PBF?qs=9%252BKlkBgLFf2xb8HkRZHvkw%3D%3D
VR1 VR2 VR3: "Variable Resistor", Manufacturer_Name=Bourns, Mouser Part Number=652-91A1A-B28-A10L, Arrow Part Number=91A1A-B28-A10L, Arrow Price/Stock=https://www.arrow.com/en/products/91a1a-b28-a10l/bourns, Datasheet Link=https://componentsearchengine.com/Datasheets/2/91A1A-B28-A10L.pdf, Height=17.45mm, Manufacturer_Part_Number=91A1A-B28-A10L, Mouser Price/Stock=https://www.mouser.co.uk/ProductDetail/Bourns/91A1A-B28-A10L?qs=1v0N1zrvLE7fztbDhYOM%252Bg%3D%3D

## Free pads (board coordinates)
  round 1.524 hole 0.762: 2(110,230.5) 3(201.5,231) 4(177.5,230) 5(120.5,231)
  round 4.572 hole 3.048: MH1(95,113.5) MH4(96.5,28.5) MH4(96.5,78.5) MH4(96.5,100) MH4(99,225) MH4(154,28) MH4(154,49.5) MH4(154,100) MH4(276,77.5)
  round 4.5 hole 3.2: MH2(219.6,93.1) MH3(219.6,121) MH4(167.5,88) MH4(168.8,136.2)
  round 4.572 hole 3.2: MH4(166,77.5) MH4(168,65.5) MH4(210.5,30) MH4(228.5,65.5) MH4(271,30) MH4(275,243.5) MH4(290,33) MH4(290,245) MH4(327,33) MH4(327.5,245)

## Via types
v1: diameter 1.27, hole 0.711, Top Layer to Bottom Layer, 31 vias

## Nets (pads, with @x,y where several pads share a name; then routed paths per layer and width w, separated by ;. In a path a pad name is that pad's centre, name@x,y a point inside that pad or via, vN(x,y) a via of type N, cw(c..) or ccw(c..) an arc to the next point about the centre after c; other vN are vias at no path point)
Aktivera: IC14.1 IC20.1 J16.2 R34.2 | length 154.4
  Top Layer w0.254: IC14.1@127.47,123.38 124,126.85 124,158 127,161 131.5,161 135,164.5 142.5,164.5 144,166 144,209 146.12,211.12 IC20.1 ; v1(150.5,162.5) 172.5,162.5 173.5,161.5 J16.2 184.5,161.5 R34.2
  Bottom Layer w0.254: v1(143,164.5) 145,162.5 v1(150.5,162.5)
Annatskydd: IC14.5 IC20.13 J16.1 R50.1 T6.1 | length 175.8
  Top Layer w0.254: IC14.5@127.47,133.54 126.46,133.54 126,134 126,157 128,159 146.5,159 148.5,161 148.5,164 ; R50.1 150.5,226 151,226.5 151,229 ; T6.1 151,229 ; IC20.13 156,207.11 156,201 154,199 154,195.5 150.5,192 148.5,190 148.5,164 ; v1(158,219.5) 158,227.5 156.5,229 151,229 ; J16.1 148.54,164.04 148.5,164
  Bottom Layer w0.254: IC20.13 160,211.11 160,217.5 v1(158,219.5)
ARDUINO_CURRENT: J14.3 pad.3 VR2.2 | length 123.5
  Top Layer w0.254: J14.3 188,155.5 188.5,156 188.5,223 189.5,224 211,224 216.5,229.5 216.5,231 214,233.5 209,233.5 206,236.5 203.5,236.5 VR2.2 pad.3
Current_Rectified: IC7.3 IC9.1 IC18.3 R28.1 R31.1 | length 68.5
  Top Layer w0.254: IC18.3 248.24,167 249,167 252,170 252,185 252.484,185.484 252.484,186.484 v1(252.5,186.5) ; IC9.1 261.19,190.579 262.5,191.889 262.5,195.5 R28.1 266.5,198.5 R31.1 269.8,203.5 IC7.3
  Bottom Layer w0.254: v1(252.5,186.5) 256.137,186.5 256.637,186 260.16,186 IC9.1
GateOk: IC14.11 IC19.2 IC19.5 IC19.9 IC19.12 | length 29.1
  Top Layer w0.254: v1(112,127) 113.08,125.92 IC19.2 116.638,126.088 116.638,126.813 119.832,130.007 119.832,130.752 IC14.11 117.416,133.504 116.506,133.504 IC19.5 113.46,133.54 v1(112.5,134.5)
  Bottom Layer w0.254: IC19.12 109.99,127 v1(112,127) ; IC19.9 110.11,134.5 v1(112.5,134.5)
GND: C12.1 C15.1 C19.1 C23.1 C24.1 C25.2 C26.1 C27.1 C28.1 C29.1 C30.1 C31.1 C32.1 C33.1 C34.2 C35.1 C36.2 C37.1 C38.2 C39.2 C40.2 C41.1 C42.1 C43.2 C44.2 C45.2 C46.1 C47.2 C48.2 C49.2 C50.1 C51.2 IC1.4 IC1.5 IC1.6 IC2.3 IC3.3 IC4.3 IC5.3 IC7.5 IC7.6 IC8.5 IC8.6 IC9.5 IC9.6 IC10.5 IC10.6 IC11.7 IC11.8 IC11.9 IC11.11 IC11.12 IC12.7 IC12.9 IC12.10 IC12.12 IC12.13 IC13.7 IC13.9 IC13.10 IC13.12 IC13.13 IC14.7 IC14.9 IC14.10 IC15.1 IC15.3 IC15.5 IC15.7 IC15.11 IC15.13 IC16.1 IC16.2 IC16.7 IC16.9 IC16.10 IC16.12 IC16.13 IC17.3 IC17.7 IC17.9 IC17.11 IC17.13 IC18.4 IC18.5 IC18.6 IC19.7 IC20.9 IC20.11 J1.3 J6.3 J11.1 J12.1 J13.2 J14.1 LED14.2 R7.2 R13.2 R19.2 R25.2 R30.2 R31.2 R32.2 R33.2 R34.1 R38.2 R39.1 R41.2 R43.2 R44.2 R45.2 R46.2 R47.2 R48.2 R49.2 R51.2 R52.2 R54.2 R55.2 R56.2 T2.1@104,237 T6.2 TERMINAL_BLOCK5.2 VR1.3 VR2.3 VR3.3
GND_Galv: C1.2 C2.2 C3.2 C4.2 C5.2 C6.2 C7.2 C8.2 GND1.1 J8.1 J8.3 J9.1 J9.3 pad.MH4@96.5,78.5 pad.MH4@154,28 pad.MH4@154,49.5 R20.1 R21.1 T3.3 T4.3
HvOutput1: J3.1 J3.3 OUTPUT1.1 R8.1 T1.3 T3.2@113.58,56.5 | length 31.9
  Top Layer w0.254: 107.5,74.5 107.5,77 109.5,79 R8.1 ; 115.004,67.504 117,69.5 ; J3.3 118.96,75.5 117,73.54 117,69.5 ; J3.1 124.04,75.5 121,72.46 121,70 120.5,69.5 117,69.5
HvOutput2: J4.1 J4.3 OUTPUT2.1 R9.1 T2.3 T4.2@135.54,56.5 | length 26.2
  Top Layer w0.254: J4.3 145.96,80.5 151,80.5 153.5,83 156.851,83 157,82.851 157,75 ; 148,75.5 148.04,75.54 J4.1
Inv1In: IC17.5
Inv1Ut: IC17.6
MINUS15: C28.2 C29.2 C30.2 C31.2 C46.2 C50.2 IC6.2 IC7.4 IC8.4 IC9.4 IC10.4 J13.3 R53.2 | length 243.2
  Top Layer w0.254: v1(150.5,172) 184.5,172 ; C46.2 260.5,142.5 264.78,142.5 265.89,141.39 IC6.2
  Top Layer w1.5: J13.3 111,172 C50.2 114,172 119.5,172 ; R53.2 119.5,172 ; v1(139.5,172) 119.5,172 ; IC10.4 269.211,154.431 270.931,154.431 C31.2 274.77,158.27 274.77,188.5 ; IC9.4 270.211,188.431 271.931,188.431 C28.2 274.77,188.5 ; IC7.4 270.53,207.03 C29.2 274.77,208.5 ; IC8.4 270.28,223 C30.2 274.77,220.23 274.77,208.5 ; 274.54,189.73 274.77,189.5 ; 274.77,188.5 274.77,189.5 ; 274.77,189.5 274.77,208.5
  Bottom Layer w1.5: v1(139.5,172) v1(150.5,172)
NetC9_2: C9.2 R5.2 T1.1@226.92,55 | length 8.9
  Top Layer w0.254: T1.1@226.92,55 227,54.92 C9.2 228,48 R5.2
NetC10_1: C10.1 C11.1 IC2.5 J5.1 J5.3
NetC10_2: C10.2 C11.2 IC2.8 R3.1 | length 21.2
  Top Layer w0.254: R3.1 270,38.5 C10.2 270.27,45.77 270.27,48.23
  Top Layer w2: IC2.8 270.27,48.23 272.5,48.23 C11.2@272.635,48.365
NetC13_1: C13.1 C14.1 IC3.8 R4.2 | length 12.8
  Top Layer w0.254: IC3.8 244.465,49.845 247.345,49.845 C13.1 ; R4.2 C13.1 ; C14.1 C13.1
NetC13_2: C13.2 C14.2 IC3.5 J2.1 J2.3 | length 0.2
  Top Layer w0.254: C14.2@254.365,55.135 C14.2
NetC16_2: C16.2 R18.2 T3.1@166.42,55 | length 8.9
  Top Layer w0.254: T3.1@166.42,55 166.5,54.92 C16.2 167.5,48 R18.2
NetC17_1: C17.1 C18.1 IC4.5 J10.1 J10.3
NetC17_2: C17.2 C18.2 IC4.8 R15.1 | length 21.2
  Top Layer w0.254: R15.1 209.5,38.5 C17.2 209.77,45.77 209.77,48.23
  Top Layer w2: IC4.8 209.77,48.23 212,48.23 C18.2@212.135,48.365
NetC19_2: C19.2 IC1.2 R16.2 | length 9.7
  Top Layer w0.254: C19.2 125,220 R16.2 129.8,221 IC1.2
NetC20_1: C20.1 C21.1 IC5.8 R17.2 | length 12.8
  Top Layer w0.254: IC5.8 183.965,49.845 186.845,49.845 C20.1 ; R17.2 C20.1 ; C21.1 C20.1
NetC20_2: C20.2 C21.2 IC5.5 J7.1 J7.3 | length 0.2
  Top Layer w0.254: C21.2@193.865,55.135 C21.2
NetC22_1: C22.1 D9.2 IC10.2 R27.2 | length 30.2
  Top Layer w0.254: IC10.2 262.73,158.73 264,160 264,162.5 266.5,165 C22.1 269.7,165.2 269.7,169.262 D9.2 272,171.562 272,175.5 R27.2
NetC22_2: C22.2 D9.1 D10.2 IC10.1 | length 21.5
  Top Layer w0.254: D10.2 D9.1 259.5,169.062 C22.2 261.5,163 261.5,157.889 260.19,156.579 IC10.1
NetC25_1: C25.1 IC8.3 R29.1 | length 6.2
  Top Layer w0.254: IC8.3 269.594,218.206 270.794,218.206 R29.1
NetC38_1: C38.1 IC13.2 R36.2 | length 22.9
  Top Layer w0.254: C38.1 R36.2 138.5,141 138.5,127.78 IC13.2
NetC40_1: C40.1 IC13.5 R37.2 | length 20.7
  Top Layer w0.254: C40.1 R37.2 144.5,145.5 144.5,143.5 142,141 142,135.02 IC13.5
NetC41_2: C41.2 IC18.2 R40.2 | length 12.6
  Top Layer w0.254: R40.2 238.5,159 C41.2 239.531,160.031 240.531,160.031 243.23,162.73 IC18.2
NetC43_1: C43.1 IC16.5 R42.1 | length 9.4
  Top Layer w0.254: 239.5,215 C43.1 243,216.73 IC16.5
NetC52_1: C52.1 C53.1 C54.1 C55.1 C56.1 C57.1 C58.1 C59.1 C60.1 C61.1 KOND1.1 KOND1_1.1 pad.MH4@290,33 pad.MH4@290,245
NetC52_2: C52.2 C53.2 C54.2 C55.2 C56.2 C57.2 C58.2 C59.2 C60.2 C61.2 KOND2.1 KOND2_2.1 pad.MH4@327,33 pad.MH4@327.5,245
NetD1_1: D1.1 R3.2 | length 17.2
  Top Layer w0.254: R3.2 262,34.5 264.5,37 264.5,44.438 D1.1
NetD2_1: D2.1 R4.1 | length 4.4
  Top Layer w0.254: D2.1 246.562,34.562 R4.1
NetD3_1: D3.1 IC3.6 R11.1 | length 5.8
  Top Layer w0.254: R11.1 D3.1@239.438,47.5 ; IC3.6 239.23,47.708 D3.1@239.438,47.5 ; D3.1 D3.1@239.438,47.5
NetD4_1: D4.1 IC2.6 R12.2 | length 19.1
  Top Layer w0.254: R12.2@251,38.5 252.062,39.562 D4.1 256.562,42.5 263.73,49.668 IC2.6
NetD4_2: D4.2 J5.2 R12.1 | length 15.8
  Top Layer w0.254: J5.2 254.705,32.205 254.705,33.205 260,38.5 263,38.5 R12.1 262.969,42.469 D4.2
NetD5_1: D5.1 R15.2 | length 17.2
  Top Layer w0.254: R15.2 201.5,34.5 204,37 204,44.438 D5.1
NetD6_1: D6.1 R17.1 | length 4.4
  Top Layer w0.254: D6.1 186.062,34.562 R17.1
NetD7_1: D7.1 IC5.6 R23.1 | length 5.8
  Top Layer w0.254: R23.1 D7.1@178.938,47.5 ; IC5.6 178.73,47.708 D7.1@178.938,47.5 ; D7.1 D7.1@178.938,47.5
NetD7_2: D7.2 J7.2 R23.2 | length 11.8
  Top Layer w0.254: J7.2 170,33.5 170.5,34 174,34 176.562,36.562 D7.2
NetD8_1: D8.1 IC4.6 R24.1 | length 19.1
  Top Layer w0.254: R24.1 191.562,39.562 D8.1 196.062,42.5 203.23,49.668 IC4.6
NetD8_2: D8.2 J10.2 R24.2 | length 15.8
  Top Layer w0.254: J10.2 194.205,32.205 194.205,33.205 199.5,38.5 R24.2 202.469,38.531 202.469,42.469 D8.2
NetD10_1: D10.1 IC9.3 R30.1 | length 17.6
  Top Layer w0.254: IC9.3 266.416,186.884 266.416,186.084 R30.1 268,179.5 268,174.938 D10.1
NetIC2_2: IC2.2 R14.1 | length 6.2
  Top Layer w0.254: R14.1 265,58.58 IC2.2
NetIC3_2: IC3.2 R10.1 | length 7.7
  Top Layer w0.254: R10.1 237.58,61.5 IC3.2 IC3.2@241.885,57.425
NetIC4_2: IC4.2 R26.1 | length 6.2
  Top Layer w0.254: R26.1 204.5,58.58 IC4.2
NetIC5_2: IC5.2 R22.1 | length 7.7
  Top Layer w0.254: R22.1 177.08,61.5 IC5.2 IC5.2@181.385,57.425
NetIC6_1: IC6.1 IC10.3 R32.1 | length 73.8
  Top Layer w0.254: IC10.3 265.27,149.23 270.27,149.23 R32.1 271,142.5 271,122.5 270.97,122.47 IC6.1
NetIC7_1: IC7.1 IC7.2 R29.2 | length 16.4
  Top Layer w0.254: R29.2 260.5,218 262.5,216 262.5,212.389 261.19,211.079 IC7.1 IC7.2
NetIC8_1: IC8.1 IC8.2 VR2.1 | length 69.4
  Top Layer w0.254: VR2.1 207.04,231.5 v1(213.5,231.5) ; v1(223.5,231.5) 250,231.5 253.5,228 v1(253.5,222) ; IC8.1 IC8.2
  Bottom Layer w0.254: v1(213.5,231.5) v1(223.5,231.5) ; v1(253.5,222) 255,220.5 260.16,220.5 IC8.1
NetIC9_2: IC9.2 R27.1 R28.2 | length 26.9
  Top Layer w0.254: R27.1 263.73,182.23 IC9.2 269.5,192.8 269.5,193 271.5,195 R28.2
NetIC11_1: IC11.1 IC11.5 | length 12.1
  Top Layer w0.254: IC11.1 233.318,192.968 233.968,192.968 234.5,193.5 236,193.5 237,192.5 237,192 237.5,191.5 242.01,191.5 IC11.5
NetIC11_2: IC11.2 IC12.6 LED7.2 | length 46.1
  Top Layer w0.254: v1(223.5,186) LED7.2 ; IC11.2 238.45,189.5 249.5,189.5 250.5,188.5 250.5,185.5 245.58,180.58 IC12.6
  Bottom Layer w0.254: v1(223.5,186) 223.5,188 225,189.5 232.39,189.5 IC11.2
NetIC11_6: IC11.6 IC16.6 | length 35.9
  Top Layer w0.254: IC16.6 245.54,218.54 247,220 250.5,220 251.5,219 251.5,198.5 245.58,192.58 IC11.6
NetIC12_1: IC12.1 IC18.1 R35.1 | length 35.7
  Top Layer w0.254: IC12.1 234.91,177.5 247.5,177.5 R35.1 249.669,175.331 249.669,174.331 250.5,173.5 250.5,171 248,168.5 244.66,168.5 IC18.1
NetIC12_2: IC12.2 R38.1 T4.2@216.42,236.5 | length 93.4
  Top Layer w0.254: T4.2@216.42,236.5 216.42,236.08 220,232.5 220,171.5 222.5,169 229,169 231.331,171.331 231.331,172.331 R38.1 231.5,177.5 231.5,179.819 232.681,181 234,181 235.42,179.58 IC12.2
NetIC12_3: IC12.3 IC12.4 | length 2.5
  Top Layer w0.254: IC12.3 IC12.4
NetIC12_5: IC12.5 R39.2 T4.1@221.5,236.5 | length 97.8
  Top Layer w0.254: T4.1@221.5,236.5 221.5,171.5 223,170 226,170 226.5,170.5 R39.2 229,172.5 230.5,174 230.5,180 232.5,182 240.57,182 IC12.5
NetIC13_3: IC13.3 IC19.1 IC19.4 | length 33.2
  Top Layer w0.254: IC19.1 119.35,120.5 130,120.5 131.5,122 131.5,124 132,124.5 140.438,124.5 142,126.062 142,126.82 IC13.3
NetIC13_6: IC13.6 IC19.10 IC19.13 | length 78.1
  Top Layer w0.254: IC19.13 109.11,126.5 110,126.5 ; IC19.10 110,132.07 110,126.5 ; IC13.6 140.44,137.093 141.492,138.145 141.492,141.492 142.5,142.5 143,143 143,145 142,146 133,146 130.5,143.5 130.5,122 130,121.5 120,121.5 118.5,123 118.5,123.851 117.851,124.5 112,124.5 110,126.5
NetIC14_3: IC14.3 IC14.4
NetIC14_6: IC14.6 IC14.13 | length 24.7
  Top Layer w0.254: IC14.13 122.16,125.84 125.992,122.008 128.508,122.008 129,122.5 129,133.738 127.94,134.798 IC14.6
NetIC15_8: IC15.8 R42.2 | length 24.3
  Top Layer w0.254: R42.2@228.851,215.149 231,213 233.851,213 234.011,212.84 234.011,211.541 235,210.552 235,210 235.5,209.5 247.5,209.5 248.12,210.12 IC15.8
NetIC15_9: IC15.9 IC16.4 LED8.2 R46.1 S1.1 | length 156
  Top Layer w0.254: S1.1 175.753,182.247 175.753,182.747 R46.1 178.5,183 180,184.5 180,187 ; LED8.2 178.5,189.75 180,188.25 180,187 ; v1(213.5,229.5) 209.5,225.5 187.5,225.5 186,224 186,191 183,188 182,188 181,187 180,187 ; v1(223.5,229.5) 249,229.5 250,228.5 250,225.5 249,224.5 246,224.5 243.5,222 243.5,220 ; IC16.4 241.96,220 243.5,220 ; IC15.9@245.58,211.42 IC15.9 247.61,213.5 249.5,213.5 249.5,217 245.5,217 244.5,218 244.5,219.5 244,220 243.5,220
  Bottom Layer w0.254: v1(213.5,229.5) v1(223.5,229.5)
NetIC19_3: IC19.3 J12.3 | length 35.6
  Top Layer w0.254: 104.54,132.96 J12.3 101.5,134.46 101.5,139 103.492,140.992 110.992,140.992 111.141,140.843 111.141,129.956 112.636,128.46 IC19.3
NetIC19_6: IC19.6 J11.2 | length 36
  Top Layer w0.254: J11.2 100.5,128.5 100.5,140 102.5,142 111.5,142 112.5,141 112.5,138 114.42,136.08 IC19.6
NetIC19_8: IC19.8 J12.2 | length 6.8
  Top Layer w0.254: J12.2 106.12,138.62 IC19.8
NetIC19_11: IC19.11 J11.3 | length 9.8
  Top Layer w0.254: J11.3 105.822,126.282 105.822,128.292 IC19.11
NetIC20_2: IC20.2 LED17.2 | length 56
  Top Layer w0.254: IC20.2 151.362,208.58 157.298,214.516 182.484,214.516 184.508,212.492 184.508,202.508 184.5,202.5 184.5,199.25 181.5,196.25 LED17.2
NetIC20_4: IC20.4 LED16.2 | length 53.3
  Top Layer w0.254: IC20.4 149.53,204.53 154,209 154,210.5 157.508,214.008 182.21,214.008 184,212.218 184,203.75 181.5,201.25 LED16.2
NetIC20_6: IC20.6 LED13.2 | length 51.5
  Top Layer w0.254: IC20.6 155,203.89 155,210.5 158,213.5 182,213.5 183.492,212.008 183.492,208.242 181.5,206.25 LED13.2
NetIC20_12: IC20.12 LED11.2 | length 28.9
  Top Layer w0.254: IC20.12 162,210.57 162,212 162.992,212.992 180.008,212.992 180.363,212.637 180.363,212.387 181.5,211.25 LED11.2
NetJ3_2: J3.2 R8.2 T1.1@118.96,71.5 | length 10.6
  Top Layer w0.254: T1.1@118.96,71.5 121.5,74.04 J3.2 R8.2
NetJ8_2: J8.2 R20.2 T3.1@108.12,56.5 | length 9.7
  Top Layer w0.254: R20.2 106,49 J8.2 106,52.92 108.08,55
NetLED1_1: LED1.1 R7.1 | length 12.9
  Top Layer w0.254: R7.1@253,67.5 251,65.5 251,61.5 253.5,59 LED1.1
NetLED2_1: LED2.1 R5.1 | length 6.4
  Top Layer w0.254: R5.1 230.977,37.477 230.977,38.327 231.75,39.1 LED2.1
NetLED3_1: LED3.1 R13.1 | length 14
  Top Layer w0.254: R13.1 243,59 LED3.1
NetLED4_1: LED4.1 R19.1 | length 12.9
  Top Layer w0.254: R19.1@192.5,67.5 190.5,65.5 190.5,61.5 193,59 LED4.1
NetLED5_1: LED5.1 R18.1 | length 6.4
  Top Layer w0.254: R18.1 170.477,37.477 170.477,38.327 171.25,39.1 LED5.1
NetLED6_1: LED6.1 R25.1 | length 14
  Top Layer w0.254: R25.1 182.5,59 LED6.1
NetLED7_1: LED7.1 R41.1 | length 5.6
  Top Layer w0.254: LED7.1 R41.1
NetLED8_1: LED8.1 R43.1 | length 7.2
  Top Layer w0.254: R43.1 180.4,192.5 181.877,191.023 LED8.1@182.127,191.023
NetLED9_1: LED9.1 R44.1 | length 6.4
  Top Layer w0.254: R44.1 168.5,152.5 LED9.1
NetLED10_1: LED10.1 R48.1 | length 6.6
  Top Layer w0.254: R48.1 164,152 LED10.1
NetLED11_1: LED11.1 R49.1 | length 3.3
  Top Layer w0.254: R49.1 178.1,210.5 LED11.1
NetLED12_1: LED12.1 R51.1 | length 4.1
  Top Layer w0.254: R51.1 131.5,186.231 133.269,188 LED12.1
NetLED13_1: LED13.1 R52.1 | length 3.1
  Top Layer w0.254: R52.1 LED13.1
NetLED14_1: LED14.1 R53.1 | length 3.1
  Top Layer w0.254: R53.1 LED14.1
NetLED15_1: LED15.1 R54.1 | length 3.5
  Top Layer w0.254: R54.1 133.727,181 134.5,181.773 LED15.1
NetLED16_1: LED16.1 R55.1 | length 3.3
  Top Layer w0.254: R55.1 178.1,201.5 LED16.1
NetLED17_1: LED17.1 R56.1 | length 3.6
  Top Layer w0.254: R56.1 177.827,197 178.6,196.227 LED17.1
NetR2_1: R2.1 R6.1 T2.2@98.92,237 | length 39.3
  Top Layer w0.254: T2.2@98.92,237 107,228.92 107,220 113,214 R6.1 R2.1
NetR16_1: pad.2 pad.5 R16.1 VR1.2 | length 26.6
  Top Layer w0.254: R16.1 111.875,221 110,222.875 pad.2 110.344,230.5 110.844,231 pad.5 ; VR1.2 120.48,234.48 pad.5@120.48,231.02
NetR40_1: pad.4 R40.1 VR3.2 | length 158.3
  Top Layer w0.254: pad.4 VR3.2 177.5,238 179,239.5 210,239.5 218,231.5 218,171.5 222.5,167 230,167 234.5,162.5 234.5,154.5 236.5,152.5 240,152.5 242,154.5 R40.1
NetR45_1: R45.1 S1.2 | length 3.3
  Top Layer w0.254: R45.1 176.75,186.25 S1.2
NetR47_1: R47.1 S1.3 | length 7.8
  Top Layer w0.254: R47.1 181.5,178.5 S1.3
PLUS5: C12.2 C32.2 C33.2 C34.1 C35.2 C36.1 C37.2 C39.1 C42.2 C44.1 C45.1 C48.1 C49.1 IC1.8 IC11.14 IC12.14 IC13.14 IC14.14 IC15.14 IC16.14 IC17.14 IC18.8 IC19.14 IC20.14 J14.2 LED12.2 R1.2 R2.2 R35.2 R50.2 S1.4 TERMINAL_BLOCK5.1 VR1.1 | length 457.6
  Top Layer w0.254: IC19.14 110,121.91 C44.1 ; IC13.14 134,121.8 C33.2 ; C12.2 137.5,223.78 IC1.8 ; IC17.14 145.03,120.47 C36.1 ; R50.2 155.524,225.976 R50.2@156,225.5 ; C35.2 231.41,186 IC12.14 ; C32.2 230.47,200.47 IC11.14 ; C42.2@237.341,170.841 C42.2 238.802,172.302 240.522,172.302 IC18.8 240.61,172.47 237.58,175.5 R35.2
  Top Layer w1.5: C44.1 110,116 ; R1.2 119,226 ; C39.1 121,116 ; VR1.1 123,229 ; R2.2 119,203.5 ; C33.2 134,116 ; LED12.2 137.5,193.121 136.121,194.5 119,194.5 ; C36.1 146.5,116.879 145.621,116 ; R50.2@155.524,225.976 155.514,225.965 156,225.48 156,223 ; C48.1 156,223 ; C45.1 190.96,150.96 J14.2 187.957,150.917 186.417,150.917 184.5,149 184.5,143.5 182,141 165.5,141 161,136.5 161,120.5 156.5,116 145.621,116 ; C35.2 226,186 226,198 ; C32.2 226,198 ; IC16.14 229.44,226.44 C34.1 226,223 226,210 ; IC15.14 231.41,210 226,210 ; 110,116 103.5,116 98,121.5 98,191.5 101,194.5 C49.1 119,194.5 ; 110,116 121,116 ; 119,194.5 119,203.5 ; 119,203.5 119,226 ; 119,226 120,226 123,229 ; 121,116 134,116 ; 123,229 134.5,229 C12.2 139.5,226 142.5,223 156,223 ; 134,116 145.621,116 ; 226,198 226,210
  Bottom Layer w0.254: IC14.14 121,122.3 C39.1 ; C48.1 156,212.59 IC20.14
  other v1: 223.5,226.5 209.5,229
PLUS15: C23.2 C24.2 C26.2 C27.2 C47.1 C51.1 IC6.3 IC7.8 IC8.8 IC9.8 IC10.8 J13.1 LED15.2 VR3.1 | length 239.3
  Top Layer w0.254: C51.1@112.511,160.511 C51.1 105.5,160.5 J13.1 101,165 101,181 103.5,183.5 132.5,183.5 133.5,184.5 136.5,184.5 137.4,183.6 LED15.2 ; v1(150.5,169) 185,169
  Top Layer w1.5: C51.1@112.511,160.511 115.011,160.511 117,162.5 117,167.5 118.5,169 v1(139.5,169) ; C23.2 256.73,227.73 255.5,226.5 255.5,213.23 ; C23.2@258.038,227.538 258.614,227.538 258.652,227.5 259.11,227.5 261.08,229.47 IC8.8 ; IC10.8 258.72,159.5 C26.2 255.5,161 255.5,193.5 ; IC9.8 261.022,194.802 260.302,194.802 259,193.5 257.5,193.5 255.5,193.5 ; IC7.8 261.08,214.97 259.34,213.23 C27.2 255.5,213.23 ; 255.5,193.5 255.5,213.23
  Bottom Layer w1.5: v1(139.5,169) v1(150.5,169)
PWM: IC13.1 IC17.1 J16.3 LED9.2 R33.1 R36.1 | length 119.5
  Top Layer w0.254: IC13.1 143.5,126.36 143.5,140 147.5,144 R36.1 153.332,143.831 153.332,142.831 150.5,140 150.5,125.85 IC17.1 153.88,123.38 155,124.5 155,139 159,143 165.2,143 168.25,146.05 LED9.2 169.273,146.823 180.323,146.823 181,147.5 181,156.46 J16.3 178.52,158.98 186.48,158.98 R33.1
PWM_B: J6.2 LED6.2 R22.2 | length 36.5
  Top Layer w0.254: LED6.2 189.5,59.25 187.5,61.25 R22.2 189.201,63.201 189.201,67.552 190.149,68.5 193.5,68.5 196.5,65.5 207,65.5 210.5,62 J6.2
PWM_B_INV: J6.1 LED4.2 R26.2 | length 30.6
  Top Layer w0.254: R26.2 194.65,63 LED4.2@198.4,59.25 ; LED4.2 LED4.2@198.4,59.25 ; J6.1 211.54,58.5 207.149,58.5 206,59.649 206,63.5 205,64.5 202.5,64.5 198.4,60.4 LED4.2@198.4,59.25
PWM_Inv: IC13.4 IC17.2 LED10.2 R37.1 | length 59.1
  Top Layer w0.254: IC13.4 142.508,132.988 142.508,140.008 151,148.5 R37.1 155,147 ; IC17.2 151.5,127.39 151.5,139 155,142.5 155,147 ; LED10.2 163.75,146.05 162.977,146.823 162.977,146.851 162.828,147 155,147
PWM_T: J1.1 LED1.2 R14.2 | length 30.6
  Top Layer w0.254: R14.2 255.15,63 LED1.2@258.9,59.25 ; LED1.2 LED1.2@258.9,59.25 ; J1.1 272.04,58.5 267.649,58.5 266.5,59.649 266.5,63.5 265.5,64.5 263,64.5 258.9,60.4 LED1.2@258.9,59.25
PWM_T_INV: J1.2 LED3.2 R10.2 | length 36.5
  Top Layer w0.254: LED3.2 250,59.25 248,61.25 R10.2 249.701,63.201 249.701,67.552 250.649,68.5 254,68.5 257,65.5 267.5,65.5 271,62 J1.2
Temp: C15.2 IC1.3 J15.1 R6.2 | length 127.9
  Top Layer w0.254: R6.2 124.885,208.115 124.885,212.385 C15.2 ; IC1.3 130.38,217.58 129.85,217.58 C15.2 ; v1(142.5,167) 142.5,210.5 141.5,211.5 137,211.5 136,212.5 124.885,212.5 C15.2 ; v1(149,158.5) 151,160.5 170.5,160.5 176.725,154.276 177.765,154.276 J15.1
  Bottom Layer w0.254: v1(142.5,167) 140.5,167 138.5,165 138.5,161.5 141.5,158.5 v1(149,158.5)
Tempskydd: IC1.1 IC14.2 IC20.3 J15.2 R1.1 | length 182
  Top Layer w0.254: IC14.2@127.47,125.92 127.47,127.122 125,129.592 125,157.5 127.5,160 132.5,160 135,162.5 v1(141.5,162.5) 143.5,162.5 145.5,164.5 145.5,202.01 IC20.3 149.46,206.04 148,207.5 148,209.351 148.649,210 150.5,210 151.5,211 151.5,212.851 151.351,213 138.5,213 134.5,217 134.5,218.84 IC1.1 130.092,223.248 130.092,223.908 R1.1 ; v1(151.5,158.5) 169.5,158.5 177,151 J15.2
  Bottom Layer w0.254: v1(141.5,162.5) 143.5,160.5 150.5,160.5 151.484,159.516 151.484,158.516 v1(151.5,158.5)
Tgate1: D3.2 J2.2 R11.2 | length 11.8
  Top Layer w0.254: J2.2 230.5,33.5 231,34 234.5,34 237.062,36.562 D3.2
Tgate2: J4.2 R9.2 T2.1@140.92,71.5 | length 21
  Top Layer w0.254: T2.1@140.92,71.5 143.42,71.5 145.5,73.58 J4.2 147.5,79.5 152,79.5 154,81.5 R9.2
Tgate4: J9.2 R21.2 T4.1@130.08,56.5 | length 10
  Top Layer w0.254: R21.2@127.5,47.5 129.756,49.757 129.756,50.757 130,51 T4.1@130,56.5
VCC_BOT: C16.1 D5.2 D6.2 LED5.2 T3.2@171.5,55 | length 34.6
  Top Layer w0.254: LED5.2 171.5,46 171.867,46.367 172,46.5
  Top Layer w2: T3.2@171.5,55 C16.1 171.5,46.734 171.867,46.367 173.296,44.938 182.5,44.938 D6.2 183.438,45 190.562,45 D5.2
VCC_TOP: C9.1 D1.2 D2.2 LED2.2 T1.2@232,55 | length 34.6
  Top Layer w0.254: LED2.2 232,46 232.367,46.367 232.5,46.5
  Top Layer w2: T1.2@232,55 C9.1 232,46.734 232.367,46.367 233.796,44.938 243,44.938 D2.2 243.938,45 251.062,45 D1.2
Vsupply50: C1.1 C2.1 C3.1 C4.1 C5.1 C6.1 C7.1 C8.1 SUPPLY1.1 T1.2@113.5,71.5 T2.2@135.46,71.5 | length 28